# EAGLE board STorM32 BGC mpu module v009 (EAGLE 6.5.0)
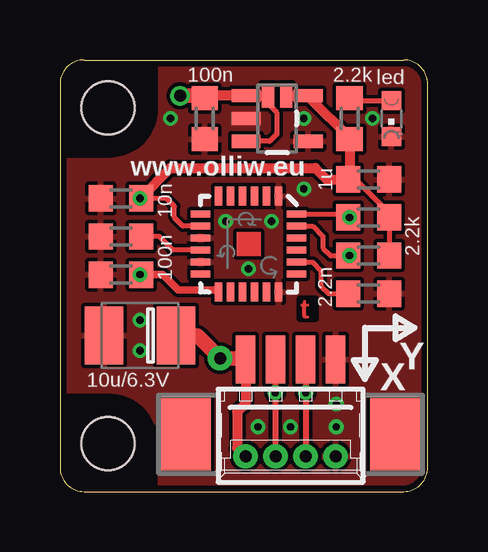
[diagram p0: board, top side]
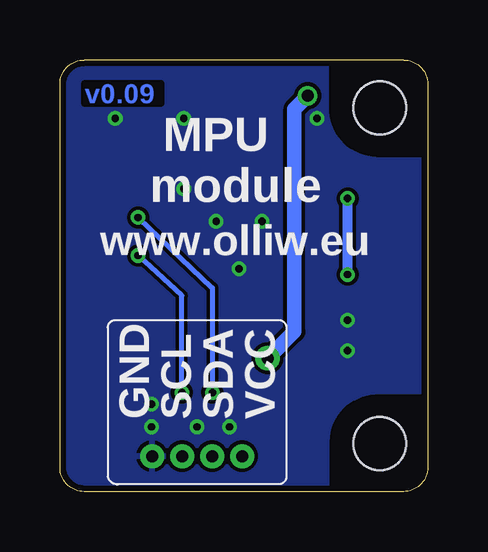
[diagram p1: board, bottom side, seen from below]

Size 15.32 x 18 mm. Coordinates in mm from the lower left corner, seen from the top.
Outline: 1,18 14.32,18 arc-90 15.32,17 15.32,1 arc-90 14.32,0 1,0 arc-90 0,1 0,17 arc-90 1,18
Copper layers (1*16): Top 0.035mm / dielectric 1.5mm / Bottom 0.035mm
Design rules "Fusion_eagle_rule_v1.1-shapes-supply-changed": minimum track width 6mil, minimum drill 12mil, track to track 6mil, track to pad 6mil, pad to pad 6mil, via to via 6mil, smd to smd 0mil, copper to edge 10mil, drill to drill 10mil, minimum pad ring 10mil, minimum via ring 6mil, stop-mask expansion 2mil, vias tented up to drill 100mil, thermal gap 6mil
Holes 2.2 mm at 2,2 2,16

## Footprints (pad centres in the part's own frame; a part is rotated, then mirrored left to right if it is on the bottom)
SMC_B = smd 1.6 x 2.4: + -1.5,0; - 1.5,0
C0603 = smd 1 x 1.1: 1 -0.85,0; 2 0.85,0
QFN-24 = smd 0.8 x 0.3: 1 -2,1.25; 2 -2,0.75; 3 -2,0.25; 4 -2,-0.25; 5 -2,-0.75; 6 -2,-1.25; 13 2,-1.25; 14 2,-0.75; 15 2,-0.25; 16 2,0.25; 17 2,0.75; 18 2,1.25 | smd 0.3 x 0.8: 7 -1.25,-2; 8 -0.75,-2; 9 -0.25,-2; 10 0.25,-2; 11 0.75,-2; 12 1.25,-2; 19 1.25,2; 20 0.75,2; 21 0.25,2; 22 -0.25,2; 23 -0.75,2; 24 -1.25,2
SOT23-5 = smd 0.55 x 1.2: 1 -0.95,-1.3; 2 0,-1.3; 3 0.95,-1.3; 4 0.95,1.3; 5 -0.95,1.3
MOLEX-53261-04-SMD-BOTH = smd 0.8 x 2: 1 1.875,-2.5; 2 0.625,-2.5; 3 -0.625,-2.5; 4 -1.875,-2.5 | drill 0.5 pad 0.698: 5 1.875,1.545; 6 0.625,1.545; 7 -0.625,1.545; 8 -1.875,1.545 | smd 2.1 x 3: S1 4.375,0.625; S2 -4.375,0.625
CHIPLED_0603 = smd 0.8 x 0.8: A 0,-0.75; C 0,0.75
R0603 = smd 1 x 1.1: 1 -0.85,0; 2 0.85,0
SJ_2S-NO = smd 0.508 x 1.016: 1 -0.381,0; 2 0.381,0

## Placement (x,y rotation side)
C1  10u/6.3V  [SMC_B]  3.33,6.51 180 top
C2  100n  [C0603]  6.03,15.56 270 top
C3  100n  [C0603]  2.54,9.05 180 top
C4  10n  [C0603]  2.54,12.22 180 top
C5  2.2n  [C0603]  12.86,8.26 0 top
C6  100n  [C0603]  2.54,10.64 180 top
C7  1u  [C0603]  12.86,13.02 0 top
IC1  MPU6050  [QFN-24]  7.86,10.32 270 top
IC2  [SOT23-5]  9.05,15.56 270 top
JP1  I2C#2  [MOLEX-53261-04-SMD-BOTH]  9.6,3.02 180 top
LED1  red  [CHIPLED_0603]  13.81,15.56 180 top
R1  2.2k  [R0603]  12.06,15.56 90 top
R2  2.2k  [R0603]  12.86,9.84 0 top
R3  2.2k  [R0603]  12.86,11.43 0 top
SJ1  SOLDERJUMPERNO  [SJ_2S-NO]  9.05,16.51 0 top

## Library data of the parts
C1-C7 R1-R3 = rcl
IC1 IC2 SJ1 = # SparkFun2
JP1 = # stdlib
LED1 = led

## Nets
3.3V: C3.1 C4.1 C7.1 IC1.8 IC1.13 IC2.5 R1.1 R2.2 R3.2 SJ1.2
5V: C1.+ C2.1 IC2.1 IC2.3 JP1.1 JP1.5 SJ1.1
GND: C1.- C2.2 C3.2 C4.2 C5.2 C6.2 C7.2 IC1.1 IC1.9 IC1.11 IC1.18 IC2.2 IC2.4 JP1.4 JP1.8 LED1.C
N$9: LED1.A R1.2
N$20: C6.1 IC1.10
N$24: C5.1 IC1.20
SCL: IC1.23 JP1.3 JP1.7 R2.1
SDA: IC1.24 JP1.2 JP1.6 R3.1

## Tracks (layer width: path | path; a pad name or v marks a point on that pad's centre or on a via)
3.3V  (via drill 0.3 pad 0.61)
  Top 0.152: 13.65,11.67 R3.2 | v3.33,12.22 C4.1
  Top 0.203: R3.2 R2.2 | 13.65,11.67 12.38,12.94 12.09,12.94 C7.1 | IC1.8 5.12,11.07 4.76,11.43 4.76,11.91 4.45,12.22 C4.1 | IC2.5
  Top 0.305: 6.61,8.2 IC1.13 6.51,8.41 4.92,8.41 4.29,9.05 C3.1
  Top 0.406: C3.1 v3.33,9.05 | v3.33,12.22 4.6,13.49 10.64,13.49 11.11,13.02 C7.1 12.06,13.07 R1.1 12.06,14.76 10.48,16.35 IC2.5 | SJ1.2 IC2.5
  Bottom 0.406: v3.33,9.05 v3.33,12.22
5V  (via drill 0.5 pad 0.81, 0.5 pad 1.02)
  Top 0.203: IC2.3 8.73,14.61 9.05,14.92 9.05,15.8 8.67,16.18 SJ1.1
  Top 0.406: JP1.1 7.73,3.68 7.38,3.33 7.38,1.82 JP1.5 | C2.1 6.13,16.51 6.19,16.51 IC2.1 SJ1.1
  Top 0.61: 6.19,16.51 v5,16.51 | JP1.1 7.69,5.56 v6.67,5.56 5.71,6.51 C1.+
  Bottom 0.61: v6.67,5.56 5.56,6.67 5.56,15.95 v5,16.51
GND  (via drill 0.3 pad 0.61)
  other vias: 8.26,2.7 9.6,2.7 13.02,15.56 3.33,5.87 3.33,7.14 8.81,11.27 6.91,11.27 7.86,9.29 11.51,2.7 11.51,3.65 10.16,12.62 4.6,15.56 10.16,15.56
  pour Bottom (isolate 0.152): 0.33,17 arc-90 1,17.67 14.32,17.67 arc-90 14.99,17 14.99,1 arc-90 14.32,0.33 1,0.33 arc-90 0.33,1
  pour Top (isolate 0.152): 0.33,17 arc-90 1,17.67 14.32,17.67 arc-90 14.99,17 14.99,1 arc-90 14.32,0.33 1,0.33 arc-90 0.33,1
  cutout Bottom: 0.27,13.96 2.12,13.96 arc90 4.08,16.02 4.08,17.77 1.02,17.77 arc90 0.27,17.02
  cutout Top: 0.27,13.96 2.12,13.96 arc90 4.08,16.02 4.08,17.77 1.02,17.77 arc90 0.27,17.02
  cutout Bottom: 4.06,0.25 4.06,2.1 arc90 2,4.06 0.25,4.06 0.25,1 arc90 1,0.25
  cutout Top: 4.06,0.25 4.06,2.1 arc90 2,4.06 0.25,4.06 0.25,1 arc90 1,0.25
  pour Top (no thermals): 6.91,16.03 8.65,16.03 8.65,15.08 6.91,15.08
N$9
  Top 0.152: R1.2 12.32,16.31
  Top 0.203: 12.32,16.31 LED1.A
N$20
  Top 0.203: IC1.10 4.7,10.07 4.13,10.64 C6.1
N$24
  Top 0.203: IC1.20 10.51,9.57 10.87,9.21 10.87,8.57 11.19,8.26 C5.1
SCL  (via drill 0.3 pad 0.61)
  Top 0.152: JP1.3 10.23,5.39 | v12.06,9.84 12.06,9.9 R2.1
  Top 0.203: IC1.23 10.52,11.07 10.95,10.64 10.95,10.16 11.27,9.84 R2.1 | 10.24,1.48 JP1.7
  Top 0.254: 10.23,5.39 v10.24,4.13 10.24,1.48
  Bottom 0.203: v10.24,4.13 10.24,8.18 v12.06,9.84
SDA  (via drill 0.3 pad 0.61)
  Top 0.152: 11.87,11.57 R3.1 12.06,11.49 v12.06,11.43 | JP1.2 8.98,5.55
  Top 0.203: IC1.24 11.87,11.57 | 8.97,1.48 JP1.6
  Top 0.254: 8.98,5.55 v8.97,4.13 8.97,1.48
  Bottom 0.203: v12.06,11.43 8.97,8.49 v8.97,4.13

## Text on the board
Top: t
Bottom: v0.09
tNames: led | www.olliw.eu | Y | X
bNames: MPU / module | www.olliw.eu | VCC | SDA | SCL | GND